# Altium PCB PCB1.PcbDoc
Units mil, origin at the board's own origin, x right, y up, seen from the top; angles counter-clockwise.
Board outline 4440 x 3705 mil, 2 copper layers (Top Layer, Bottom Layer); 22 components, 9 nets, 86 pads, 5 vias.
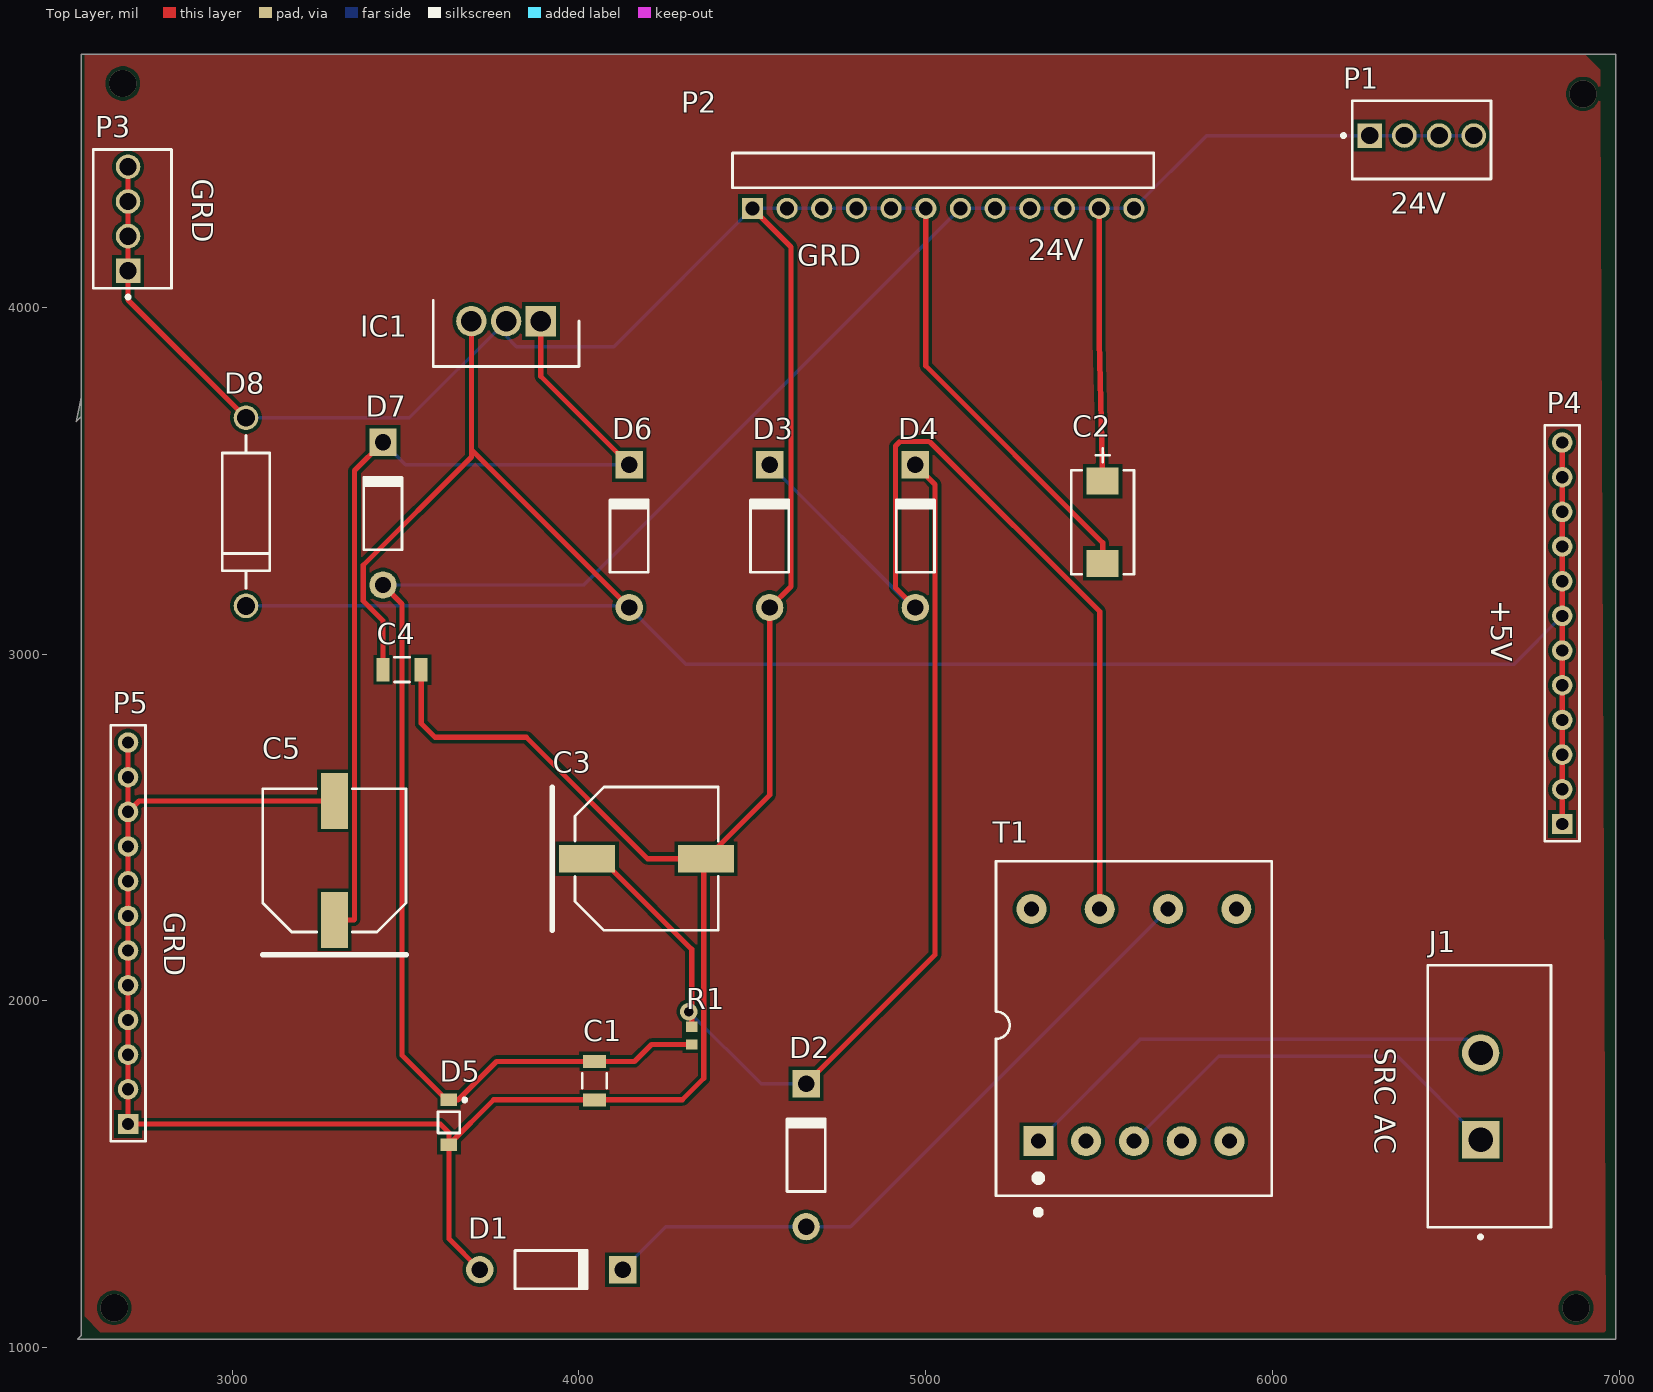
[diagram p0: Top Layer view]
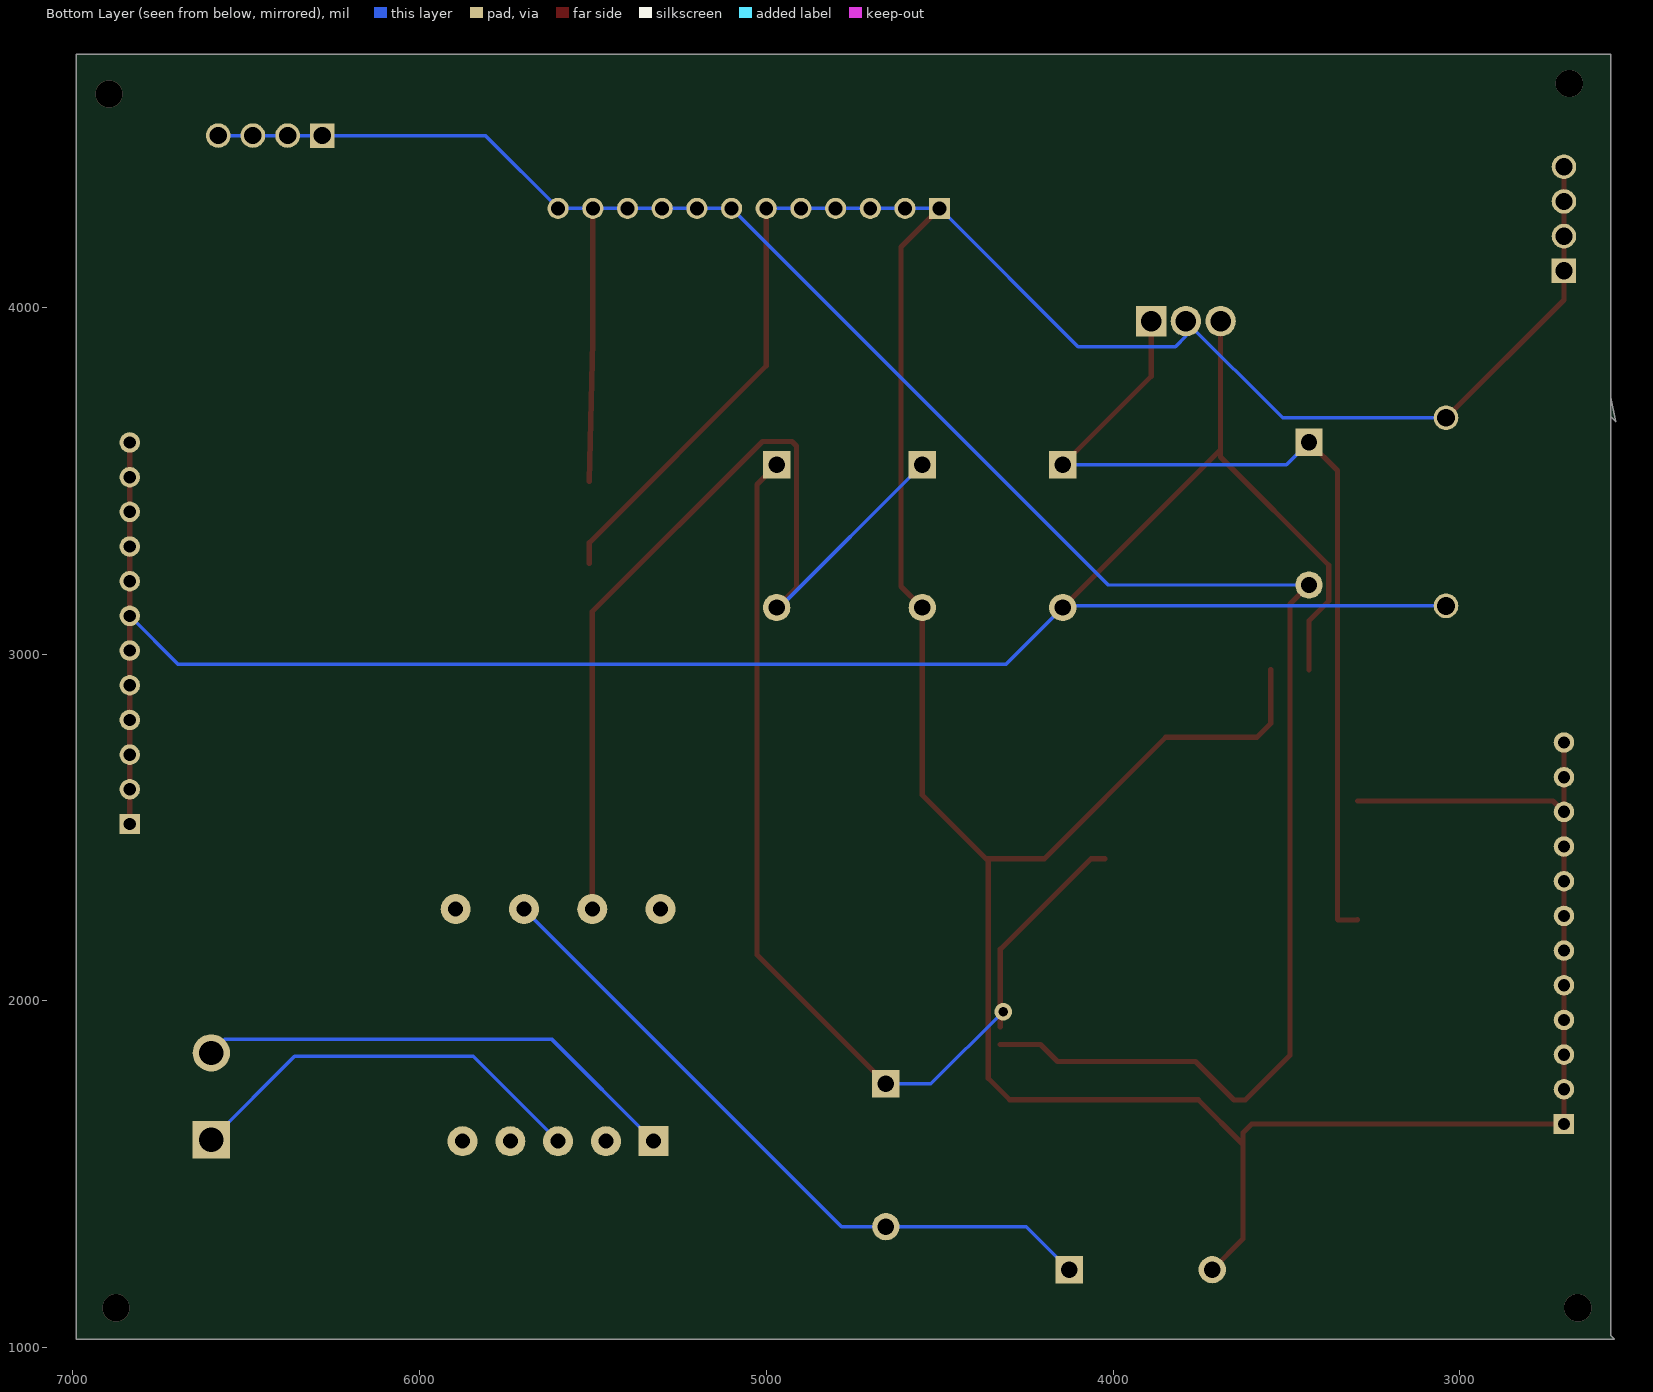
[diagram p1: Bottom Layer view, seen from below]

## Layer stack, top to bottom
Top Solder: solder mask 0.4, Solder Resist, Dk 3.5
Top Layer: signal copper 1.4
Dielectric 1: dielectric 12.6, FR-4, Dk 4.8
Bottom Layer: signal copper 1.4
Bottom Solder: solder mask 0.4, Solder Resist, Dk 3.5

## Board outline
2550,3670 2565.23,3740 2565,3740 2565,1035 2555,1025 6990,1025 6990,4675 6990,4730 6815,4730 2565,4730 2565,3685

## Design rules (kind name [scope] priority, off if disabled: settings)
Clearance [All] p1: gap=10 ignorepadtopadclearanceinfootprint=FALSE except(0: Arc-Hole Track-Hole SMDPad-Hole THPad-Hole Via-Hole Fill-Hole Poly-Hole Region-Hole Text-Hole)
PolygonConnect [All] p1: connectstyle=Relief reliefconductorwidth=10 reliefentries=4 polygonreliefangle="90 Angle" airgapwidth=10
RoutingVias [All] p1: holewidth=28 width=50 viastyle="Through Hole" minholewidth=28 minwidth=50 maxholewidth=28 maxwidth=50
SolderMaskExpansion [All] p1: expansion=4 istentingtop=FALSE
Width [All] p1: maxlimit=30 minlimit=10 preferedwidth=15 toplayer_minwidth=15 bottomlayer_maxwidth=10 bottomlayer_prefwidth=10 minimp=50.000000 maximp=50.000000 favimp=50.000000
30 further rules are at their usual default settings.

## Components (designator, comment, footprint, x,y, rotation, side; value= is the part's Value field where it differs from the comment)
C1 "C1206C103K1RACTU" FP-C1206C-EB-MFG 4045,1770 r270 top value="10,000 pF"
C2 "T491D226K025AT" FP-T491D226K025AT-MFG 5510,3380 r90 top
C3 "EEEFP1E471AP" PNSC-FP-V-G_V 4195,2410 r0 top
C4 "C1206C103K1RACTU" FP-C1206C-EB-MFG 3490.12,2955 r0 top value="10,000 pF"
C5 "EEEFP1E471AP" PNSC-FP-V-G_V 3295,2405 r90 top
D1 "Diode 1N4007" DO-41 3920,1225 r0 top
D2 "Diode 1N4007" DO-41 4655,1555 r90 top
D3 "Diode 1N4007" DO-41 4550,3340 r90 top
D4 "Diode 1N4007" DO-41 4970,3340 r90 top
D5 "MMSZ5252BT1G" ONSC-SOD-123-2-425-04_V 3625,1650 r270 top
D6 "Diode 1N4007" DO-41 4145,3340 r90 top
D7 "Diode 1N4007" DO-41 3435,3405 r90 top
D8 "1N5339BRLG" ONSC-SURMETIC40-2-017AA-01 3040,3410 r90 top
IC1 "TS7805CZ_C0" TO254P483X1000X2285-3P 3890,3960 r180 top
J1 "350428-1" FP-350428-1-MFG 6625,1725 r90 top
P1 "640456-4" TECO-640456-4 6430,4495 r180 top
P2 "TSW-112-08-F-S-RA" SMTC-TSW-112-08-X-S-RA 4500,4285 r0 top
P3 "640456-4" TECO-640456-4 2700,4255 r270 top
P4 "Header 12" HDR1X12 6835,2510 r90 top
P5 "Header 12" HDR1X12 2700,1645 r90 top
R1 "ERJ-3EKF3300V" RESC1608X55X30LL15T15 4325,1900 r270 top
T1 "7491182124" "EE16_8_5 (EF16)" 5600,1930 r90 top

## Footprints (in the part's own frame and the unit in brackets; to place one, negate y for a bottom-side part, rotate by r counter-clockwise, add the part's x,y. Pads: shape width x height; smd on the part's side, far side on the other; paste and mask are expansions set on the pad)
DO-41 [mm] "Diode, Axial; Body 5.2 x 2.7 mm (LxDia. max), Lead Dia. 0.86 mm (max)"
  round 2 hole 1.2: 1(-5.23,0)
  rect 2x2 hole 1.2: 2(5.23,0)
  silkscreen extent -2.65,-1.4 2.75,1.4
"EE16_8_5 (EF16)" [mm] "THT, 9-Leads, Body 24.5x20.2mm (max), Pitch 2.7mm"
  rect 2.2x2.2 hole 1.1: 1(-8.5,7)
  round 2.2 hole 1.1: 2(-8.5,3.5) 3(-8.5,0) 4(-8.5,-3.5) 5(-8.5,-7) 6(8.5,-7.5) 7(8.5,-2.5) 8(8.5,2.5) 9(8.5,7.5)
  silkscreen extent -13.9,-10.1 12,10.1, body extent -12.4,-9.9 11.4,9.9, height 14.55
FP-350428-1-MFG [mm]
  rect 2.73x2.73 hole 1.78 paste-1000 mask+0: 1(-3.175,0.635)
  round 2.73 hole 1.78 paste-1000 mask+0: 2(3.175,0.635)
  silkscreen extent -10.42,-4.51 9.59,4.51, body extent -9.69,-4.61 9.69,4.61, height 0.25
FP-C1206C-EB-MFG [mm]
  rect 0.95x1.7 smd paste+0 mask+0: 1(-1.4,0) 2(1.4,0)
  silkscreen extent -0.55,-0.9 0.55,0.9, body extent -2,-1 2,1, height 0.25
FP-T491D226K025AT-MFG [mm]
  rect 1.99x2.33 smd paste+0 mask+0: 1(-3.01,0) 2(3.01,0)
  silkscreen extent -3.8,-2.3 5.4,2.3, body extent -4.11,-2.4 4.11,2.4, height 0.25
HDR1X12 [mm] "Connector; Header; 12 Position"
  rect 1.5x1.5 hole 0.9: 1(0,0)
  round 1.5 hole 0.9: 2(2.54,0) 3(5.08,0) 4(7.62,0) 5(10.16,0) 6(12.7,0) 7(15.24,0) 8(17.78,0) 9(20.32,0) 10(22.86,0) 11(25.4,0) 12(27.94,0)
  silkscreen extent -1.27,-1.27 29.21,1.27
ONSC-SOD-123-2-425-04_V [mm] "SOD, 2-Leads, Body 2.69x1.6mm"
  rect 0.91x1.22 smd: 1(-1.635,0) 2(1.635,0)
  silkscreen extent -1.76,-0.8 0.78,1.29, body extent -1.35,-0.8 1.35,0.8, height 1.35
ONSC-SURMETIC40-2-017AA-01 [mm] "AXIAL, 2-Leads, Diameter 3.49mm"
  round 1.8 hole 1.3: 1(-6.888,0) 2(6.888,0)
  silkscreen extent -5.59,-1.74 5.59,1.74
PNSC-FP-V-G_V [mm] "CAPAE, 2-Leads, Body 10.50x10.50mm"
  rect 4.1x2 smd: 1(-4.35,0) 2(4.35,0)
  silkscreen extent -6.9,-5.25 5.25,5.25, body extent -6,-5.25 6,5.25, height 10.5
RESC1608X55X30LL15T15 [mm] "Chip Resistor, 2-Leads, Body 1.75x0.95mm, IPC High Density"
  rect 0.75x0.85 smd: 1(-0.65,0) 2(0.65,0)
  body extent -0.87,-0.48 0.87,0.48, height 0.55
SMTC-TSW-112-08-X-S-RA [mm] ".025 SQ Post Terminal Strip Assembly, 1x12 Pins, Right Angle, 2.54mm Pitch, Male"
  rect 1.55x1.55 hole 1.02: 1(0,0)
  round 1.55 hole 1.02: 2(2.54,0) 3(5.08,0) 4(7.62,0) 5(10.16,0) 6(12.7,0) 7(15.24,0) 8(17.78,0) 9(20.32,0) 10(22.86,0) 11(25.4,0) 12(27.94,0)
  silkscreen extent -1.46,1.52 29.4,4.06, body extent -1.27,-0.32 29.21,9.9, height 3.02
TECO-640456-4 [mm] "Through Hole, 4-Leads, Body 10.16x5.72mm, Pitch 2.54mm"
  rect 1.8x1.8 hole 1.27 paste+0: 1(3.81,0)
  round 1.8 hole 1.27 paste+0: 2(1.27,0) 3(-1.27,0) 4(-3.81,0)
  silkscreen extent -5.08,-2.54 5.86,3.18, body extent -5.08,-2.54 5.08,3.18, height 10.03
TO254P483X1000X2285-3P [mm]
  rect 2.235x2.235 hole 1.49: 1(0,0)
  round 2.235 hole 1.49: 2(2.54,0) 3(5.08,0)
  silkscreen extent -2.79,-1.51 7.87,3.33, body extent -2.46,-1.51 7.54,3.32, height 19.95

## Part data
C1 C4: library part CMP-03020-021723-1, "Cap Ceramic 0.01uF 100V X7R 10% SMD 1206 125°C Plastic T/R", Capacitance="10,000 pF", Manufacturer=KEMET, Package=C1206C-EB, Temperature="-55°C to +150°C", Temperature Characteristic=X7R, Temperature Coefficient=15%, Temperature Range High=+150°C, Temperature Range Low=-55°C, Tolerance=0.1, Voltage Rating="100 V", Automotive=Yes, Automotive Grade="Grade 0", Category=Cap, ComponentLink2Description=Datasheet, ComponentLink2URL=https://content.kemet.com/datasheets/KEM_C1007_X8R_ULTRA_150C_SMD.pdf, Device Class L1="Passive Components", Device Class L2=Capacitors, Device Class L3="Ceramic Capacitors", Digikey Description="Cap Ceramic 0.01uF 100V X7R 10% SMD 1206 125°C Plastic T/R", Height=0.88mm, Ipc Land Pattern Name=CAPC320160X78, Lead Free=Yes, Manufacturer Part Number=C1206C103K1RACTU, Material=Ceramic, Mouser Description="Multilayer Ceramic Capacitors MLCC - SMD/SMT 100volts 10000pF X7R 10%", Octopart=https://octopart.com/c1206c103k1ractu-kemet-117927, RoHS=TRUE
C2: library part CMP-03017-000021-1, "CAP TANT 22UF 10% 25V 2917", Capacitance=22uF, Case Code (Imperial)=2917, Case Code (Metric)=7343, Dielectric Material=Tantalum, ESR (Equivalent Series Resistance)=800mR, Leakage Current=5.5uA, Max Operating Temperature=125°C, Min Operating Temperature=-55°C, Package Quantity=1, Ripple Current=433mA, Tolerance=10%, Voltage=25V, Case/Package=2917, Depth=4.3mm, Dissipation Factor=6%, Features="General Purpose", Height=2.8mm, Height - Seated (Max)=0.122inch, Lead Free="Lead Free", Length=7.3mm, Life (Hours)=2000Hour, Mount="Surface Mount", Number of Pins=2, Packaging="Tape and Reel", Polarity=Polar, Radiation Hardening=No, REACH SVHC="No SVHC", Termination=SMD/SMT, Voltage Rating=25V, Voltage Rating (DC)=25V, Width=4.3mm
C3 C5: library part CMP-2000-06214-1, "Aluminum Electrolytic Capacitor, 470 uF, +/- 20%, 25 V, 2-Pin SMD (Size Code G), -55 to 105 degC, RoHS, Tape and Reel", Capacitance=470µF, Case Size/Dimension=Ø10x10.2mm, ESR (Equivalent Series Resistance)=0.06O, Lifetime@Temperature=2000Hrs@105°C, Manufacturer=Panasonic, Operating Temp Range=-55to+105°C, Operating Temp-Max=105°C, Package Description="2-Pin Electrolytic Aluminum Capacitor, Body 10.3 x 10.3 mm", Package Reference=FP-V-G, Rated Voltage=25V, Ripple Current=1190mA, Datasheet URL=http://industrial.panasonic.com/cdbs/www-data/pdf/RDE0000/ABA0000C1184.pdf, Datasheet Version=03/2016, Manufacturer URL=http://www.panasonic.com/, Mounting Technology=SurfaceMount, Package URL=http://industrial.panasonic.com/cdbs/www-data/pdf/RDE0000/DME0000COL48.pdf, Series=FP, Type=Can
D1 D2 D3 D4 D6 D7: "1 Amp General Purpose Rectifier", Code_JEDEC=DO-204-AL, ComponentLink1Description="Manufacturer Link", ComponentLink1URL=http://www.fairchildsemi.com/, ComponentLink2Description=Datasheet, ComponentLink2URL=http://www.fairchildsemi.com/ds/1N%2F1N4001.pdf, DatasheetVersion=1998, LatestRevisionDate=17-Jul-2002, LatestRevisionNote="Re-released for DXP Platform.", PackageDescription="Diode, Axial; Body 5.2 x 2.7 mm (LxDia. max), Lead Dia. 0.86 mm (max)", PackageReference=DO-41, PackageVersion=Aug-1999, Published=8-Jun-2000, Publisher="Altium Limited"
D5: library part CMP-1060-00444-1, "Zener Voltage Regulator, 500 mW, 2-Pin SOD-123, Pb-Free, Tape and Reel", Manufacturer="On Semiconductor", ComponentLink1Description="Manufacturer URL", ComponentLink1URL=http://www.onsemi.com/, ComponentLink2Description=Datasheet, ComponentLink2URL=http://www.onsemi.com/pub_link/Collateral/MMSZ5221BT1-D.PDF, ComponentLink3Description="Package Specification", ComponentLink3URL=http://www.onsemi.com/pub_link/Collateral/425-04.PDF, DatasheetVersion="Rev. 12", Mounting Technology="Surface Mount", P Max (W)=0.5, PackageDescription="2-Pin SOD, Body 1.6 x 2.69 mm", PackageReference=SOD-123-2-425-04, PackageVersion="Rev. G, 10/2009", Packing="Tape and Reel", PartNumber=MMSZ5252BT1G, RoHS=Pb-Free, VZ Typ (V)=24
D8: library part CMP-1060-01298-1, "5 W Zener Voltage Regulator, 2-Pin Surmetic(TM) 40, Pb-Free, Tape and Reel", Manufacturer="On Semiconductor", ComponentLink1Description="Manufacturer URL", ComponentLink1URL=http://www.onsemi.com/, ComponentLink2Description=Datasheet, ComponentLink2URL=http://www.onsemi.cn/pub_link/Collateral/1N5333B-D.PDF, ComponentLink3Description="Package Specification", ComponentLink3URL=http://www.onsemi.cn/pub_link/Collateral/017AA.PDF, DatasheetVersion="Rev. 14", Mounting Technology="Through Hole", P Max (W)=5, PackageDescription="2-Pin, Axial Lead, Diameter 3.49 mm", PackageReference=SURMETIC40-2-017AA-01, PackageVersion="Rev. O, 09/2005", Packing="Tape and Reel", PartNumber=1N5339BRLG, RoHS=Pb-Free, VZ Typ (V)=5.6
IC1: "Integrated Circuit", Arrow Part Number="TS7805CZ C0", Manufacturer_Name="Taiwan Semiconductor", Mouser Part Number=821-TS7805CZC0, Arrow Price/Stock=https://www.arrow.com/en/products/ts7805czc0/taiwan-semiconductor, Datasheet Link=http://www.taiwansemi.com/products/datasheet/TS7800_G1612.pdf, Height=4.83mm, Manufacturer_Part_Number="TS7805CZ C0", Mouser Price/Stock=https://www.mouser.com/Search/Refine.aspx?Keyword=821-TS7805CZC0
J1: library part CMP-03369-000080-1, "CONN HEADER VERT 2POS 6.35MM", Current Rating=12A, Manufacturer="TE Connectivity", Temperature="-40°C to +105°C", Temperature Range High=+105°C, Temperature Range Low=-40°C, Voltage Rating=600V, Automotive=No, Category=Conn, ComponentLink2Description=Datasheet, ComponentLink2URL=https://www.te.com/commerce/DocumentDelivery/DDEController?Action=showdoc&DocId=Customer+Drawing%7F350428%7FY2%7Fpdf%7FEnglish%7FENG_CD_350428_Y2.pdf%7F350428-1, Conn Gender=Male, Conn Orientation=Vertical, Contact Material=Gold,Nickel, Device Class L1=Connectors, Device Class L2="Headers and Wire Housings", Device Class L3=unset, Digikey Description="CONN HEADER VERT 2POS 6.35MM", Height=14.99mm, Lead Free=Yes, Manufacturer Part Number=350428-1, Mouser Description="Connector, Soft Shell; Universal MATE-N-LOK; 2; Nylon; Natural; 19 A; 600 VAC", Number Of Contacts=2, Number Of Rows=1, Octopart=https://octopart.com/350428-1-te+connectivity-46505355, Package=350428-1, Pitch=6.35mm, RoHS=TRUE, Standoff Height=0.63mm
P1 P3: library part CMP-2000-05419-1, "Male Header, Pitch 2.54 mm, 1 x 4 Position, Height 10.03 mm, Tail Length 3.56 mm, RoHS, Bulk", Color=White, Current, Rating="5 /  / A", Flammability Rating=UL94V-0, Manufacturer="TE Connectivity", Temperature, Operating="-55to+105 /  / degC", Voltage, Rating="250 /  / V", Agency Approvals=CSA,UL, Angle=Straight, Brand/Series=MTA-100Series, Color, Housing=White, Connector Type=MTA-100, Contact Centerline Spacing="0.100 /  / in.", Contact Mating Area Plating=Tin, Contact Plating=Tin, Contact Shape=Square, Contact Termination Area Plating=Tin, Datasheet URL=https://datasheet.ciiva.com/16286/eng-ds-82056-mta-0608-16286228.pdf, Datasheet Version=Dec-14, Length, Overall="0.4 /  / \"", Length, Pin="0.14 /  / \"", Length, Terminal Post="0.14 /  / in.", Manufacturer URL=http://www.te.com/, Material, Contact=CopperAlloy, Material, Housing=Polyester, Mount Angle=Vertical, Mounting Hole Size="0.04 /  / \"", Mounting Type=PCMount, Number Of Contacts=4, Number of Positions=4, Number Of Rows=1, Pin Spacing="0.1 /  / \"", Primary Type=InterconnectSystem, Size, Post="0.025 /  / in.", Special Features=Pinstrip, Standards=RoHSCompliant,ELVCompliant,UL94V-0, Termination=Solder, Type=PCBPlug
P2: library part CMP-1024-00428-1, "0.025\" SQ Post Header, Through-hole, Right Angle, -55 to 125 degC, 2.54 mm Pitch, 12-Pin, Male, RoHS", Manufacturer=Samtec, Temperature Range="-55 to 125 degC", ComponentLink1Description="Manufacturer URL", ComponentLink1URL=http://www.samtec.com, ComponentLink2Description=Datasheet, ComponentLink2URL=http://www.samtec.com/documents/webfiles/pdf/TSW_TH.PDF, ComponentLink3Description="Package Specification", ComponentLink3URL=http://www.samtec.com/documents/webfiles/cpdf/TSW-XXX-XX-XXX-X-XX-XXX-MKT.pdf, DatasheetVersion=F-214, Mounting Technology=Through-hole, Orientation="Right Angle", PackageDescription=".025[0.64] SQ. Post Terminal Strip Assembly", PackageReference=TSW-112-08-X-S-RA, PackageVersion="DM, 8/1988", PartNumber=TSW-112-08-F-S-RA, Pitch="2.54 mm", RoHS=True
P4 P5: "Header, 12-Pin", LatestRevisionDate=17-Jul-2002, LatestRevisionNote="Re-released for DXP Platform.", Publisher="Altium Limited"
R1: library part CMP-2000-00435-2, "Chip Resistor, 330 Ohm, +/- 1%, 0.1 W, -55 to 155 degC, 0603 (1608 Metric), RoHS, Tape and Reel", Current Rating="500 mA", Max Operating Temperature="85 degC", Min Operating Temperature="-25 degC", Package Quantity=1500, Voltage Rating="10 V", ComponentLink1Description="Manufacturer URL", ComponentLink1URL=http://www.panasonic.com/, ComponentLink2Description=Datasheet, ComponentLink2URL=http://industrial.panasonic.com/cdbs/www-data/pdf/RDA0000/AOA0000C86.pdf, Contact Finish=Gold, Contact Material=Copper, Contact Plating=Gold, DatasheetVersion=Apr-15, Gender=Male, Height="1.45 mm", Lead Pitch="1.1 mm", Length="13.7 mm", Mating Cycles=10000, Mount="Surface Mount", PackageDescription="2-Pin Surface Mount Device, Body 1.6 x 0.85 mm", PackageReference=0603, Packaging="Tape and Reel", Pins=8, REACH SVHC="No SVHC", RoHSCompliant=true, Width="1.45 mm"
T1: library part CMP-1476-00010-1, "Off-Line Transformer WE-UNIT , L=0.9mH", Inductance=0.9mH, Input Voltage (AC)=85-265, Manufacturer="Wuerth Elektronik", Output current (A)=0.125, Output Voltage (DC)=24, ComponentLink1Description="Manufacturer URL", ComponentLink1URL=http://www.we-online.com, ComponentLink2Description=Datasheet, ComponentLink2URL=http://www.we-online.de/katalog/media/pdf/7491182124.pdf, PackageReference="EE16_8_5 (EF16)", PartNumber=7491182124, Turns Ratio="\"4.4\",\"1\""

## Via types
v1: diameter 78.74, hole 78.74, Top Layer to Bottom Layer, 4 vias
v2: diameter 50, hole 28, Top Layer to Bottom Layer, 1 vias

## Nets (pads, with @x,y where several pads share a name; then routed paths per layer and width w, separated by ;. In a path a pad name is that pad's centre, name@x,y a point inside that pad or via, vN(x,y) a via of type N, cw(c..) or ccw(c..) an arc to the next point about the centre after c; other vN are vias at no path point)
+5: C4.1 D6.1 D8.1 IC1.3 P4.1 P4.2 P4.3 P4.4 P4.5 P4.6 P4.7 P4.8 P4.9 P4.10 P4.11 P4.12 | length 6824.1
  Top Layer w15: C4.1 3435,3096 3378.13,3152.87 3378.13,3256 3690,3567.87 3690,3589.09 ; IC1.3 3690,3589.09 ; D6.1 3690,3589.09 ; P4.1 P4.2 P4.3 P4.4 P4.5 P4.6 P4.7 P4.8 P4.9 P4.10 P4.11 P4.12
  Bottom Layer w10: D8.1 4140.26,3138.84 D6.1 4309.09,2970 6695,2970 P4.7
GND: C1.2 C2.1 C3.2 C4.2 C5.2 D1.1 D3.1 D5.2 D8.2 IC1.2 P2.1 P2.2 P2.3 P2.4 P2.5 P2.6 P3.1 P3.2 P3.3 P3.4 P5.1 P5.2 P5.3 P5.4 P5.5 P5.6 P5.7 P5.8 P5.9 P5.10 P5.11 P5.12 | length 12079
  Top Layer w15: P5.12 P5.11 P5.10 ; P3.4 P3.3 P3.2 P3.1 2700,4021.16 D8.2 ; C5.2 2731.26,2576.26 P5.10 ; C4.2 3545.24,2800 3585.24,2760 3848,2760 4198,2410 C3.2@4360,2410 ; D1.1 3625,1314.09 D5.2 ; P2.1 4611,4174 4611,3195.09 D3.1 4550,2593.74 C3.2 C3.2@4360,2410 ; P2.6 5000,3831 5510,3321 C2.1 ; P5.10 P5.9 P5.8 P5.7 P5.6 P5.5 P5.4 P5.3 P5.2 P5.1 3600,1645 3625,1620 D5.2 ; D5.2 3754.25,1714.88 C1.2 4297.88,1714.88 4360,1777 C3.2@4360,2410
  Bottom Layer w10: D8.2 3511.16,3681.16 IC1.2 3790,3916 3820,3886 4101,3886 P2.1 P2.2 P2.3 P2.4 P2.5 P2.6
NetC3_1: C3.1 D2.2 D4.2 R1.1 | length 3031
  Top Layer w15: C3.1 4064,2410 4325,2149 v2@4325,1961 ; v2(4317,1969) v2@4325,1961 ; R1.1 v2@4325,1961 ; D2.2 5027,2132.91 5027,3488.91 D4.2
  Bottom Layer w10: v2(4317,1969) 4525.09,1760.91 D2.2
NetC5_1: C5.1 D6.2 D7.2 IC1.1 | length 2726.1
  Top Layer w15: C5.1 3295,2233 3351,2233 3353.13,2235.13 3353.13,3529.03 D7.2 ; IC1.1 3890,3800.91 D6.2
  Bottom Layer w10: D7.2 3500,3545.91 D6.2
NetD1_2: D1.2 D2.1 T1.7 | length 2003.2
  Bottom Layer w10: D1.2 4250,1349.09 D2.1 4782.87,1349.09 T1.7
NetD3_2: D3.2 D4.1 T1.8 | length 2735
  Top Layer w15: D4.1 4913,3191.09 4913,3600 4926,3613 5011,3613 5501.57,3122.43 T1.8
  Bottom Layer w10: D3.2 4961.81,3134.09 D4.1
NetJ1_1: J1.1 T1.3 | length 1200.7
  Bottom Layer w10: T1.3 5844.65,1840 6360,1840 J1.1
NetJ1_2: J1.2 T1.1 | length 1414.2
  Bottom Layer w10: T1.1 5619.06,1890 6560,1890 J1.2
VCC: C1.1 C2.2 D5.1 D7.1 P1.1 P1.2 P1.3 P1.4 P2.7 P2.8 P2.9 P2.10 P2.11 P2.12 R1.2 | length 6801.6
  Top Layer w15: D7.1 3490,3144.09 3490,1843.37 3619,1714.37 D5.1 3651.37,1714.37 3762.12,1825.12 C1.1 4160,1825.12 4209.29,1874.41 R1.2 ; P2.11 5500,3902 C2.2
  Bottom Layer w10: D7.1 4014.09,3199.09 P2.7 P2.8 P2.9 P2.10 P2.11 P2.12 5810,4495 P1.1 P1.2 P1.3 P1.4
pads on no net: T1.2 T1.4 T1.5 T1.6 T1.9
copper on no net:
  other v1: 2660,1115 6875,1115 6895,4615 2685,4645

## Polygon pours and split planes (outlines as drawn)
no net on Top Layer "NONET_L01_P000" (solid, pour order 0): 6945,4685 6900,4730 2575,4730 2575,1090 2620,1045 6960,1045

## Silkscreen, mask and mechanical layers (free items; w line width, h text height)
Top Overlay:
  text "GRD" at 2885,4370 h60 r270
  text "24V" at 6340,4270 h60
  text "24V" at 5295,4135 h60
  text "GRD" at 4630,4120 h60
  text "+5V" at 6630,3155 h60 r270
  text "GRD" at 2805,2255 h60 r270
  text "SRC AC" at 6295,1865 h60 r270